# Altium PCB PCB2.PcbDoc (part 2 of 2)
Units mm, origin at the board's own origin, x right, y up, seen from the top; angles counter-clockwise.
Board outline 50.17 x 32.13 mm, 2 copper layers (Top Layer, Bottom Layer); 40 components, 154 nets, 422 pads, 221 vias.
Unrouted connection lines stored in the file: 21.
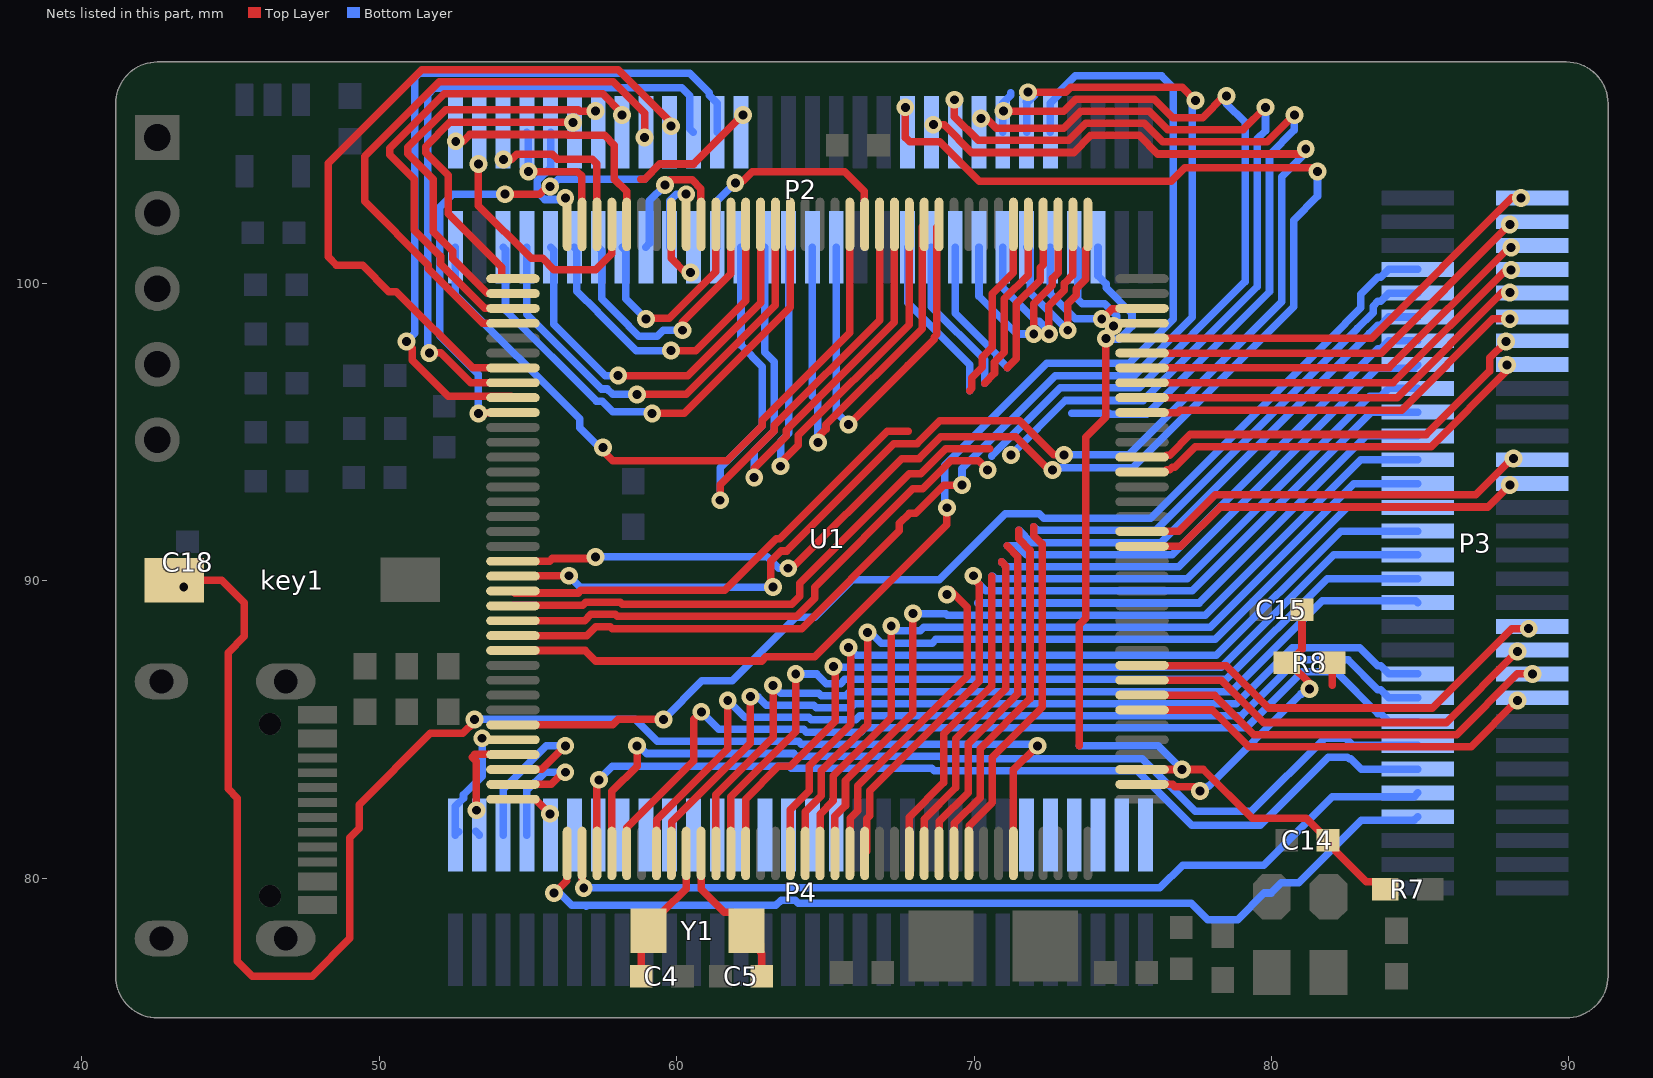
[diagram p2: the nets of this part, all layers, seen from the top]

## Via types
v1: diameter 0.6, hole 0.3, Top Layer to Bottom Layer, 221 vias

## Nets (pads, with @x,y where several pads share a name; then routed paths per layer and width w, separated by ;. In a path a pad name is that pad's centre, name@x,y a point inside that pad or via, vN(x,y) a via of type N, cw(c..) or ccw(c..) an arc to the next point about the centre after c; other vN are vias at no path point) (continued)
PB13: P2.55 U1.93 | length 17.4
  Top Layer w0.254: v1(59.182,95.631) 60.258,95.631 63.825,99.198 U1.93@63.825,101.981
  Bottom Layer w0.254: P2.55@54.168,101.219 54.25,101.137 54.25,99.102 57.31,96.042 57.504,96.042 57.859,95.687 59.126,95.687 v1(59.182,95.631)
PB14: P2.53 U1.94 | length 15.7
  Top Layer w0.254: v1(58.674,96.266) 60.319,96.266 63.325,99.272 U1.94@63.325,101.981
  Bottom Layer w0.254: P2.53@54.968,101.219 54.968,98.959 57.478,96.449 57.672,96.449 57.855,96.266 v1(58.674,96.266)
PB15: P2.51 U1.95 | length 13.9
  Top Layer w0.254: v1(58.039,96.901) 60.379,96.901 62.825,99.347 U1.95@62.825,101.981
  Bottom Layer w0.254: P2.51@55.768,101.219 55.872,101.115 55.872,98.629 57.601,96.901 v1(58.039,96.901)
PC4: P3.36 U1.54 | length 13.2
  Top Layer w0.254: U1.54@75.648,91.158 76.954,91.158 78.277,92.481 87.274,92.481 v1(88.011,93.218)
PC5: P3.38 U1.55 | length 13.5
  Top Layer w0.254: U1.55@75.648,91.658 75.657,91.667 76.888,91.667 78.109,92.888 86.861,92.888 88.081,94.107 v1(88.138,94.107)
PC6: P2.42 U1.115 | length 24.6
  Top Layer w0.254: U1.115@54.502,97.158 53.15,97.158 50.584,99.724 50.333,99.724 49.444,100.613 48.569,100.613 48.289,100.893 48.289,104.042 51.43,107.183 58.041,107.183 59.817,105.407 v1(59.817,105.283)
PC7: P2.40 U1.116 | length 22.2
  Top Layer w0.254: v1(51.689,97.663) 52.07,97.663 53.075,96.658 U1.116@54.502,96.658
  Bottom Layer w0.254: v1(51.689,97.663) 51.632,97.72 51.632,106.347 51.838,106.553 52.177,106.553 52.202,106.578 60.173,106.578 60.445,106.306 60.445,105.202 P2.40@60.568,105.079
PC8: P2.38 U1.117 | length 25.3
  Top Layer w0.254: v1(50.927,98.044) 50.927,98.001 51.054,97.874 51.11,97.818 51.11,97.423 52.322,96.21 54.45,96.21 U1.117@54.502,96.158
  Bottom Layer w0.254: v1(50.927,98.044) 51.206,98.323 51.206,106.912 51.355,107.061 60.451,107.061 61.097,106.415 61.097,106.32 61.368,106.049 P2.38@61.368,105.079
PC9: P2.36 U1.118 | length 20.2
  Top Layer w0.254: v1(53.34,95.631) 53.358,95.649 54.493,95.649 U1.118@54.502,95.658 ; v1(54.229,102.997) 55.405,102.997 55.659,103.251 v1(55.753,103.251) ; 58.801,103.505 58.928,103.505 59.436,104.013 60.579,104.013 v1(62.23,105.664)
  Bottom Layer w0.254: v1(53.34,95.631) 53.34,96.944 52.039,98.245 52.039,102.555 52.481,102.997 v1(54.229,102.997) ; v1(55.753,103.251) 55.767,103.251 56.021,103.505 58.928,103.505
PC10: P3.53 U1.139 | length 37.1
  Top Layer w0.254: U1.139@54.502,85.158 54.505,85.161 57.854,85.161 58.036,85.344 v1(59.563,85.344)
  Bottom Layer w0.254: v1(59.563,85.344) 60.854,86.635 61.87,86.635 64.008,88.773 64.643,88.773 65.913,90.043 68.834,90.043 71.044,92.253 72.188,92.253 72.34,92.1 75.937,92.1 82.479,98.643 82.479,98.651 83.007,99.179 83.007,99.629 83.577,100.199 83.672,100.199 83.943,100.47 P3.53@84.913,100.47
PC11: P4.60 U1.140 | length 4.9
  Top Layer w0.254: v1(53.467,84.709) 53.467,84.649 54.493,84.649 U1.140@54.502,84.658
  Bottom Layer w0.254: P4.60@52.675,81.564 P4.60@52.568,81.457 52.568,82.427 52.839,82.698 52.839,82.811 53.467,83.439 v1(53.467,84.709) v1@53.439,84.681
PC12: P4.58 U1.141 | length 3.4
  Top Layer w0.254: v1(53.27,82.288) 53.27,83.929 53.126,84.074 53.218,84.167 54.493,84.167 U1.141@54.502,84.158
  Bottom Layer w0.254: P4.58@53.245,81.58 P4.58@53.368,81.457
PC13: P3.19 U1.8 | length 30.2
  Top Layer w0.254: U1.8@59.825,80.835 59.834,80.844 59.834,81.898 62.484,84.548 v1(62.484,86.106)
  Bottom Layer w0.254: v1(62.484,86.106) 62.738,86.106 63.023,85.821 64.61,85.821 64.701,85.73 65.855,85.73 65.997,85.872 78.823,85.872 80.703,87.752 82.966,87.752 83.577,87.141 83.672,87.141 83.943,86.87 P3.19@84.913,86.87
PC14: C4.2 U1.9 Y1.2 | length 4.8
  Top Layer w0.254: C4.2@58.814,76.71 58.814,77.991 Y1.2@59.055,78.232 59.055,78.382 59.528,78.855 60.325,79.652 U1.9@60.325,80.835
PC15: C5.2 U1.10 Y1.1 | length 5
  Top Layer w0.254: U1.10@60.825,80.835 60.825,79.637 61.607,78.855 61.882,78.855 Y1.1@62.355,78.382 ; Y1.1@62.355,78.232 62.828,77.759 62.828,77.497 62.865,77.46 C5.2@62.865,76.708
PD0: P4.56 U1.142 | length 6.3
  Top Layer w0.254: U1.142@54.502,83.658 54.511,83.667 55.473,83.667 v1(56.261,84.455)
  Bottom Layer w0.254: P4.56@54.168,81.457 54.168,82.997 55.626,84.455 v1(56.261,84.455)
PD1: P4.54 U1.143 | length 5
  Top Layer w0.254: U1.143@54.502,83.158 55.783,83.158 56.191,83.566 v1(56.261,83.566)
  Bottom Layer w0.254: P4.54@54.968,81.457 54.968,82.954 55.58,83.566 v1(56.261,83.566)
PD2: P4.52 U1.144 | length 1.4
  Top Layer w0.254: U1.144@54.502,82.658 55.252,82.658 v1(55.741,82.169)
PD3: P4.50
PD4: P4.48
PD5: P4.46
PD6: P4.44
PD7: P4.42
PD8: P2.49 U1.96 | length 11.3
  Top Layer w0.254: v1(59.817,97.739) 60.642,97.739 62.325,99.422 U1.96@62.325,101.981
  Bottom Layer w0.254: P2.49@56.568,101.219 56.652,101.135 56.652,99.742 57.348,99.046 57.348,99.034 58.643,97.739 v1(59.817,97.739)
PD9: P2.47 U1.97 | length 9.3
  Top Layer w0.254: v1(60.198,98.425) 60.198,98.696 61.825,100.323 U1.97@61.825,101.981
  Bottom Layer w0.254: P2.47@57.368,101.219 57.491,101.096 57.491,99.478 58.391,98.578 58.391,98.566 58.73,98.227 59.351,98.227 59.549,98.425 v1(60.198,98.425)
PD10: P2.45 U1.98 | length 7.3
  Top Layer w0.254: v1(58.97,98.806) 58.996,98.831 59.758,98.831 61.325,100.398 U1.98@61.325,101.981
  Bottom Layer w0.254: P2.45@58.168,101.219 58.291,101.096 58.291,99.485 v1(58.97,98.806)
PD11: P2.43 U1.99 | length 5
  Top Layer w0.254: v1(59.614,103.302) 59.788,103.476 60.524,103.476 60.816,103.184 60.816,101.99 U1.99@60.825,101.981
  Bottom Layer w0.254: P2.43@58.968,101.219 59.091,101.342 59.091,102.779 v1(59.614,103.302)
PD12: P2.41 U1.100 | length 3.2
  Top Layer w0.254: U1.100@60.325,101.981 v1(60.325,102.997)
  Bottom Layer w0.254: P2.41@59.768,101.219 59.768,102.778 59.987,102.997 v1(60.325,102.997)
PD13: P2.39 U1.101 | length 2
  Top Layer w0.254: U1.101@59.825,101.981 59.825,100.839 60.301,100.363 v1(60.47,100.363)
PD14: P2.60 U1.104 | length 8.2
  Top Layer w0.254: v1@52.813,104.775 52.827,104.775 53.056,105.004 56.311,105.004 56.336,104.978 57.582,104.978 57.912,104.648 57.912,103.505 58.325,103.092 U1.104@58.325,101.981
  other v1: 52.578,104.775
PD15: P2.58 U1.105 | length 8
  Top Layer w0.254: v1(53.34,104.013) 53.34,102.616 55.118,100.838 55.499,100.838 55.88,100.457 57.277,100.457 57.816,100.996 57.816,101.972 U1.105@57.825,101.981
PE0: P4.12
PE1: P4.10
PE2: P3.7 U1.1 | length 32.4
  Top Layer w0.254: v1@56.007,79.616 56.316,79.925 56.316,80.826 U1.1@56.325,80.835
  Bottom Layer w0.254: v1(55.88,79.502) 56.077,79.502 56.482,79.096 56.934,79.096 56.968,79.062 57.002,79.096 63.342,79.096 63.514,79.269 63.994,79.269 64.094,79.169 77.295,79.169 77.851,78.613 78.867,78.613 79.761,79.507 79.997,79.507 80.334,79.844 80.917,79.844 83.02,81.947 84.79,81.947 P3.7@84.913,82.07
PE3: P3.9 U1.2 | length 30.4
  Top Layer w0.254: U1.2@56.825,80.835 56.834,80.826 v1@56.834,79.819
  Bottom Layer w0.254: v1(56.882,79.676) 76.247,79.676 77.018,80.447 79.742,80.447 82.044,82.748 84.791,82.748 P3.9@84.913,82.87
PE4: P3.11 U1.3 | length 32.2
  Top Layer w0.254: U1.3@57.334,80.826 U1.3@57.325,80.835 57.325,83.219 57.393,83.287 v1(57.393,83.312)
  Bottom Layer w0.254: v1(57.393,83.312) 57.845,83.763 63.794,83.763 63.86,83.698 66.696,83.698 66.699,83.7 68.573,83.7 68.656,83.617 75.486,83.617 77.315,81.788 79.629,81.788 81.915,84.074 82.552,84.074 82.608,84.018 82.663,84.018 83.011,83.67 P3.11@84.913,83.67
PE5: P3.13 U1.4 | length 32.2
  Top Layer w0.254: U1.4@57.825,80.835 57.825,82.924 58.674,83.773 v1(58.674,84.455)
  Bottom Layer w0.254: v1(58.674,84.455) 58.742,84.455 59.001,84.196 63.937,84.196 64.028,84.104 66.528,84.104 66.53,84.107 68.884,84.107 68.968,84.023 75.655,84.023 77.43,82.248 79.327,82.248 81.785,84.706 82.501,84.706 82.737,84.47 P3.13@84.913,84.47
PE6: P3.15 U1.5 | length 31.7
  Top Layer w0.254: U1.5@58.325,80.835 58.334,80.844 58.334,81.701 60.579,83.946 60.579,85.344 v1(60.833,85.598)
  Bottom Layer w0.254: v1(60.833,85.598) 61.423,85.008 64.273,85.008 64.365,84.917 66.191,84.917 66.333,85.059 79.16,85.059 81.04,86.939 82.178,86.939 83.577,85.541 83.672,85.541 83.943,85.27 P3.15@84.913,85.27
PE7: P3.60 U1.68 | length 14.7
  Top Layer w0.254: U1.68@75.648,98.158 83.369,98.158 88.081,102.87 v1(88.392,102.87)
PE8: P2.7 U1.69 | length 3.7
  Bottom Layer w0.254: P2.7@73.368,101.219 73.491,101.096 73.491,99.463 73.64,99.314 74.398,99.314 74.803,98.909 74.803,98.679 v1(74.688,98.564)
PE9: P2.9 U1.70 | length 5.1
  Top Layer w0.254: v1(74.295,98.806) 74.309,98.806 74.652,99.149 75.639,99.149 U1.70@75.648,99.158
  Bottom Layer w0.254: P2.9@72.568,101.219 72.568,99.644 73.406,98.806 v1(74.295,98.806)
PE10: P2.11 U1.73 | length 7.2
  Top Layer w0.254: v1(73.152,98.425) 73.152,99.314 73.444,99.606 73.444,99.826 73.754,100.137 73.754,101.148 73.825,101.219 U1.73@73.825,101.981
  Bottom Layer w0.254: P2.11@71.768,101.219 71.891,101.096 71.891,99.686 v1(73.152,98.425)
PE11: P2.13 U1.74 | length 7.6
  Top Layer w0.254: v1(72.517,98.298) 72.517,99.254 73.038,99.774 73.038,99.995 73.325,100.282 U1.74@73.325,101.981
  Bottom Layer w0.254: P2.13@70.968,101.219 70.968,99.847 72.085,98.73 72.188,98.73 72.517,98.401 v1(72.517,98.298)
PE12: P2.15 U1.75 | length 8
  Top Layer w0.254: v1(72.009,98.298) 72.009,99.32 72.631,99.943 72.631,100.163 72.825,100.357 U1.75@72.825,101.981
  Bottom Layer w0.254: P2.15@70.168,101.219 70.168,99.569 71.439,98.298 v1(72.009,98.298)
PE13: P2.17 U1.76 | length 10.1
  Top Layer w0.254: 71.12,97.169 71.425,97.474 71.425,99.311 72.225,100.111 72.225,100.525 72.325,100.625 U1.76@72.325,101.981
  Bottom Layer w0.254: P2.17@69.368,101.219 69.368,98.996 70.764,97.599 70.764,97.538 71.12,97.183 71.12,97.169
PE14: P2.19 U1.77 | length 11.3
  Top Layer w0.254: 70.358,96.647 70.688,96.977 70.688,97.348 71.018,97.678 71.018,99.479 71.819,100.279 71.819,100.693 71.825,100.7 U1.77@71.825,101.981
  Bottom Layer w0.254: P2.19@68.568,101.219 68.568,99.221 70.358,97.431 70.358,96.647
PE15: P2.21 U1.78 | length 11.9
  Top Layer w0.254: 69.85,96.393 69.926,96.469 69.926,96.826 70.282,97.181 70.282,97.516 70.612,97.846 70.612,99.648 71.325,100.361 U1.78@71.325,101.981
  Bottom Layer w0.254: P2.21@67.768,101.219 67.768,99.346 69.85,97.264 69.85,96.393
PF0: P3.31 U1.16 | length 28.8
  Top Layer w0.254: U1.16@63.825,80.835 63.825,82.31 64.46,82.945 64.46,83.784 65.857,85.181 65.857,87.686 v1(65.786,87.757)
  Bottom Layer w0.254: v1(65.786,87.757) 66.045,87.498 78.15,87.498 82.322,91.67 P3.31@84.913,91.67
PF1: P3.33 U1.17 | length 28.8
  Top Layer w0.254: U1.17@64.325,80.835 64.325,82.235 64.867,82.777 64.867,83.615 66.421,85.17 v1(66.421,88.265)
  Bottom Layer w0.254: v1(66.421,88.265) 66.514,88.265 66.876,87.904 68.59,87.904 68.723,88.037 ; 68.766,88.036 78.114,88.036 82.547,92.47 P3.33@84.913,92.47
PF2: P3.35 U1.18 | length 28.5
  Top Layer w0.254: U1.18@64.825,80.835 64.825,82.16 65.273,82.608 65.273,83.447 67.219,85.393 v1(67.219,88.483)
  Bottom Layer w0.254: v1(67.219,88.483) 67.381,88.321 68.185,88.321 68.307,88.443 68.891,88.443 77.946,88.443 82.773,93.27 P3.35@84.913,93.27
PF3: P3.37 U1.19 | length 28.3
  Top Layer w0.254: U1.19@65.325,80.835 65.325,82.085 65.68,82.44 65.68,83.279 67.945,85.544 v1(67.945,88.9)
  Bottom Layer w0.254: v1(67.945,88.9) 69.055,88.9 69.105,88.849 77.777,88.849 82.998,94.07 P3.37@84.913,94.07
PF4: P3.39 U1.20 | length 27.9
  Top Layer w0.254: U1.20@65.825,80.835 65.834,80.844 65.834,82.019 66.086,82.272 66.086,83.11 69.771,86.795 69.771,89.106 v1@69.179,89.698
  Bottom Layer w0.254: 70.129,89.256 77.572,89.256 83.186,94.87 P3.39@84.913,94.87
  other v1: 69.088,89.535
PF5: P3.41 U1.21 | length 28.7
  Top Layer w0.254: U1.21@66.325,80.835 66.392,80.902 66.392,82.003 66.492,82.103 66.492,82.942 70.177,86.627 70.177,89.883 69.977,90.083 v1(69.977,90.17)
  Bottom Layer w0.254: v1(69.977,90.17) 69.977,90.083 70.398,89.662 77.343,89.662 83.351,95.67 P3.41@84.913,95.67
PF6: P3.43 U1.24 | length 27.5
  Top Layer w0.254: U1.24@67.825,80.835 67.825,82.06 68.986,83.221 68.986,84.861 70.59,86.465 70.59,90.148
  Bottom Layer w0.254: 70.59,90.148 70.634,90.148 70.714,90.068 77.175,90.068 83.306,96.199 83.672,96.199 83.943,96.47 P3.43@84.913,96.47
PF7: P3.45 U1.25 | length 27.9
  Top Layer w0.254: U1.25@68.325,80.835 68.325,81.985 69.393,83.053 69.393,84.693 71.069,86.369 71.069,90.494 70.93,90.634
  Bottom Layer w0.254: 70.93,90.634 71.088,90.475 76.886,90.475 83.558,97.147 84.79,97.147 P3.45@84.913,97.27
PF8: P3.47 U1.26 | length 28.5
  Top Layer w0.254: U1.26@68.825,80.835 68.834,80.844 68.834,81.919 69.799,82.885 69.799,84.525 71.476,86.201 71.476,90.817 71.12,91.172 71.12,91.186
  Bottom Layer w0.254: 71.12,91.186 71.459,91.186 71.763,90.881 76.659,90.881 83.577,97.799 83.672,97.799 83.943,98.07 P3.47@84.913,98.07
PF9: P3.49 U1.27 | length 28.8
  Top Layer w0.254: U1.27@69.325,80.835 69.334,80.844 69.334,81.844 70.206,82.716 70.206,84.356 71.882,86.033 71.882,91.035 71.501,91.416 71.501,91.694
  Bottom Layer w0.254: 71.501,91.694 71.525,91.694 71.932,91.288 76.274,91.288 83.292,98.306 83.292,98.314 83.577,98.599 83.672,98.599 83.943,98.87 P3.49@84.913,98.87
PF10: P3.51 U1.28 | length 28.5
  Top Layer w0.254: U1.28@69.825,80.835 69.834,80.844 69.834,81.77 70.612,82.548 70.612,84.074 72.288,85.75 72.288,91.238 72.009,91.517 72.009,91.821
  Bottom Layer w0.254: 72.009,91.821 72.136,91.694 76.105,91.694 82.886,98.474 82.886,98.483 83.414,99.01 83.414,99.236 83.577,99.399 83.672,99.399 83.943,99.67 P3.51@84.913,99.67
PF11: P3.46 U1.59 | length 13.9
  Top Layer w0.254: U1.59@75.648,93.658 76.41,93.658 76.481,93.729 76.576,93.729 76.669,93.822 76.744,93.822 77.435,94.513 85.367,94.513 87.913,97.06 v1(87.913,97.253)
PF12: P3.48 U1.60 | length 14.1
  Top Layer w0.254: U1.60@75.648,94.158 76.41,94.158 76.481,94.229 76.576,94.229 77.267,94.92 85.198,94.92 87.333,97.055 87.333,97.493 v1(87.884,98.044)
PF13: P3.50 U1.63 | length 13.7
  Top Layer w0.254: U1.63@75.648,95.658 76.856,95.658 76.93,95.733 84.372,95.733 87.446,98.806 v1(88.011,98.806)
PF14: P3.52 U1.64 | length 13.8
  Top Layer w0.254: U1.64@75.648,96.158 84.223,96.158 87.76,99.695 v1(88.011,99.695)
PF15: P3.54 U1.65 | length 14
  Top Layer w0.254: U1.65@75.648,96.658 84.085,96.658 87.874,100.447 v1(88.059,100.447)
PG0: P3.56 U1.66 | length 14.1
  Top Layer w0.254: U1.66@75.648,97.158 83.95,97.158 88.001,101.209 v1(88.059,101.209)
PG1: P3.58 U1.67 | length 14.2
  Top Layer w0.254: U1.67@75.648,97.658 83.688,97.658 v1(88.011,101.981)
PG2: P2.56 U1.106 | length 5.4
  Top Layer w0.254: v1(54.185,104.165) 54.461,104.165 54.634,104.338 55.826,104.338 55.999,104.165 57.167,104.165 57.316,104.017 57.316,101.99 U1.106@57.325,101.981
PG3: P2.54 U1.107 | length 4.8
  Top Layer w0.254: v1(55.024,103.759) 56.667,103.759 56.816,103.61 56.816,101.99 U1.107@56.825,101.981
  Bottom Layer w0.254: P2.54@54.968,105.079 55.014,105.033 55.014,103.769 v1(55.024,103.759)
PG4: P2.52 U1.108 | length 3.3
  Bottom Layer w0.254: P2.52@55.768,105.079 55.768,103.893 55.321,103.446 55.321,103.072 55.574,102.819 56.196,102.819 56.247,102.87 v1(56.261,102.87)
PG5: P2.50 U1.109 | length 11.1
  Top Layer w0.254: U1.109@54.502,100.158 54.141,100.158 54.12,100.179 54.12,100.54 52.324,102.336 52.324,103.632 51.568,104.388 51.568,104.598 52.38,105.41 v1(56.515,105.41)
PG6: P2.48 U1.110 | length 13.7
  Top Layer w0.254: U1.110@54.502,99.658 54.493,99.667 53.632,99.667 52.472,100.827 52.472,101.075 51.816,101.731 51.816,103.505 50.963,104.358 50.963,104.568 52.237,105.842 56.694,105.842 56.744,105.792 v1(57.277,105.791) v1(57.277,105.791)
PG7: P2.46 U1.111 | length 16.5
  Top Layer w0.254: U1.111@54.502,99.158 54.493,99.167 53.554,99.167 52.065,100.656 52.065,100.907 51.181,101.791 51.181,103.505 50.359,104.327 50.359,104.538 52.191,106.37 57.517,106.37 58.166,105.721 v1(58.166,105.664)
PG8: P2.44 U1.112 | length 20
  Top Layer w0.254: U1.112@54.502,98.658 53.488,98.658 51.659,100.487 51.659,100.614 49.515,102.758 49.515,104.269 52.023,106.777 57.873,106.777 58.928,105.721 v1(58.928,104.902)
PG9: P4.40
PG10: P4.38
PG11: P4.36
PG12: P4.34
PG13: P4.32
PG14: P4.30
PG15: P4.28
PH2: P3.18 U1.43 | length 13.8
  Top Layer w0.254: U1.43@75.648,85.658 78.01,85.658 79.243,84.425 86.711,84.425 v1(88.265,85.979)
PH3: P3.20 U1.44 | length 14.5
  Top Layer w0.254: U1.44@75.648,86.158 78.084,86.158 79.411,84.831 86.228,84.831 88.267,86.87 v1(88.773,86.87)
PH4: P3.22 U1.45 | length 14.2
  Top Layer w0.254: U1.45@75.648,86.658 78.315,86.658 79.735,85.238 85.873,85.238 v1(88.265,87.63)
PH5: P3.24 U1.46 | length 14.7
  Top Layer w0.254: U1.46@75.648,87.158 75.657,87.149 78.478,87.149 79.902,85.725 85.411,85.725 88.078,88.392 v1(88.646,88.392)
PH6: P2.27 U1.83 | length 14.3
  Top Layer w0.254: v1(65.786,95.25) 67.782,97.246 67.818,97.282 68.656,98.12 68.656,98.19 68.754,98.288 68.754,101.892 68.834,101.972 U1.83@68.825,101.981
  Bottom Layer w0.254: P2.27@65.368,101.219 65.368,95.668 v1(65.786,95.25) v1@65.881,95.155
PH7: P2.29 U1.84 | length 15.4
  Top Layer w0.254: v1(64.753,94.647) v1@64.848,94.742 ; v1@64.77,94.836 65.024,95.09 65.024,95.241 68.254,98.471 68.254,101.91 U1.84@68.325,101.981
  Bottom Layer w0.254: P2.29@64.568,101.219 64.568,96.214 64.753,96.029 v1(64.753,94.647)
PH8: P2.31 U1.85 | length 17.4
  Top Layer w0.254: v1(63.5,93.853) 63.5,93.969 64.096,94.564 64.096,94.887 67.825,98.616 U1.85@67.825,101.981
  Bottom Layer w0.254: v1(63.5,93.853) 63.5,94.69 63.768,94.958 P2.31@63.768,101.219
PH9: P2.33 U1.86 | length 18.6
  Top Layer w0.254: v1(62.611,93.472) 62.611,93.783 63.689,94.862 63.689,95.055 67.325,98.691 U1.86@67.325,101.981
  Bottom Layer w0.254: v1(62.611,93.472) 62.611,94.375 63.283,95.047 63.283,97.372 62.968,97.687 P2.33@62.968,101.219
PH10: P2.35 U1.87 | length 20.9
  Top Layer w0.254: v1(61.468,92.71) 61.468,93.232 63.283,95.047 63.283,95.224 66.825,98.766 U1.87@66.825,101.981
  Bottom Layer w0.254: v1(61.468,92.71) 61.468,93.807 62.876,95.215 62.876,97.204 62.168,97.912 P2.35@62.168,101.219
PH11: P2.37 U1.88 | length 8.3
  Top Layer w0.254: v1(61.976,103.378) 62.042,103.444 62.237,103.444 62.552,103.759 65.659,103.759 66.316,103.102 66.316,101.99 U1.88@66.325,101.981
  Bottom Layer w0.254: P2.37@61.368,101.219 61.368,102.77 v1(61.976,103.378)
PH12: P2.59 U1.89 | length 22.9
  Top Layer w0.254: v1(57.531,94.488) 57.531,94.361 57.856,94.036 61.697,94.036 62.876,95.215 62.876,95.392 65.825,98.341 U1.89@65.825,101.981
  Bottom Layer w0.254: P2.59@52.568,101.219 52.568,99.621 56.74,95.449 56.74,95.152 57.404,94.488 v1(57.531,94.488)
PH13: P2.22 U1.128 | length 51.6
  Top Layer w0.254: U1.128@54.502,90.658 55.733,90.658 55.827,90.752 57.224,90.752 v1(57.277,90.805) ; v1(63.754,90.424) 63.881,90.424 67.564,94.107 68.15,94.107 68.887,94.844 71.399,94.844 72.507,93.736 72.634,93.736 v1(72.644,93.726) ; v1(67.691,105.918) 67.691,104.904 67.84,104.755 68.854,104.755 70.175,103.434 76.637,103.434 77.089,103.886 81.38,103.886 81.507,103.759 v1(81.547,103.759)
  Bottom Layer w0.254: v1(57.277,90.805) 63.049,90.805 63.43,90.424 v1(63.754,90.424) ; v1(72.644,93.726) 72.72,93.802 75.34,93.802 80.747,99.209 80.747,102.128 81.547,102.928 v1(81.547,103.759)
PH14: P2.20 U1.129 | length 50.5
  Top Layer w0.254: U1.129@54.502,90.158 54.508,90.164 56.382,90.164 v1(56.388,90.17) ; v1(63.246,89.789) 63.175,89.86 63.175,90.664 63.514,91.003 63.698,91.003 67.31,94.615 68.083,94.615 68.845,95.377 71.532,95.377 72.675,94.234 v1(73.025,94.234) ; v1(68.631,105.334) 68.641,105.325 69.004,105.325 69.93,104.399 73.353,104.399 73.928,104.973 75.551,104.973 76.176,104.348 80.98,104.348 v1(81.153,104.521)
  Bottom Layer w0.254: v1(56.388,90.17) 56.769,89.789 v1(63.246,89.789) ; v1(73.025,94.234) 75.197,94.234 80.34,99.377 80.34,103.581 81.153,104.394 v1(81.153,104.521)
PH15: P2.18 U1.130 | length 43.4
  Top Layer w0.254: U1.130@54.502,89.658 54.569,89.591 56.694,89.591 56.786,89.683 61.618,89.683 63.346,91.41 63.47,91.41 67.082,95.022 67.79,95.022 ; v1(69.342,106.172) 69.342,105.607 70.143,104.805 73.185,104.805 73.76,105.38 75.719,105.38 76.345,104.754 79.862,104.754 v1(80.772,105.664)
  Bottom Layer w0.254: 73.279,95.631 74.54,95.631 74.566,95.606 75.813,95.606 79.934,99.726 79.934,104.318 80.772,105.156 v1(80.772,105.664)
PI0: P2.16 U1.131 | length 45.8
  Top Layer w0.254: U1.131@54.502,89.158 54.52,89.176 56.854,89.176 56.954,89.276 58.108,89.276 58.174,89.21 63.867,89.21 64.135,89.478 64.135,89.916 67.818,93.599 68.217,93.599 69.055,94.437 70.536,94.437 ; v1(70.231,105.537) 70.428,105.537 70.753,105.212 73.017,105.212 73.591,105.786 75.888,105.786 76.513,105.161 79.042,105.161 v1(79.799,105.918)
  Bottom Layer w0.254: v1(71.247,94.234) 73.076,96.063 75.695,96.063 79.527,99.895 79.527,104.861 79.799,105.133 v1(79.799,105.918)
PI1: P2.14 U1.132 | length 45.8
  Top Layer w0.254: U1.132@54.502,88.658 56.911,88.658 57.123,88.87 57.939,88.87 58.006,88.803 64.035,88.803 64.643,89.411 64.643,89.789 67.945,93.091 68.284,93.091 69.223,94.031 70.156,94.031 v1(70.461,93.726) v1@70.6,93.726 ; v1(70.993,105.791) 73.021,105.791 73.423,106.193 76.056,106.193 76.681,105.567 77.685,105.567 78.416,106.299 v1(78.486,106.299)
  Bottom Layer w0.254: 70.6,94.197 72.897,96.495 75.553,96.495 79.121,100.063 79.121,105.41 78.486,106.045 v1(78.486,106.299) ; P2.14@70.968,105.079 70.968,106.049 71.239,106.32 71.239,106.415
PI2: P2.12 U1.133 | length 42.9
  Top Layer w0.254: U1.133@54.502,88.158 56.986,88.158 57.291,88.463 57.771,88.463 57.838,88.397 64.204,88.397 67.493,91.686 67.493,91.934 67.832,92.273 68.041,92.273 68.985,93.218 v1(69.596,93.218) ; v1(71.818,106.426) 73.082,106.426 73.255,106.599 76.992,106.599 v1(77.445,106.147)
  Bottom Layer w0.254: v1(69.596,93.218) 69.596,93.768 72.729,96.901 75.384,96.901 77.343,98.86 77.343,106.031 77.445,106.133 v1(77.445,106.147) ; P2.12@71.768,105.079 71.768,106.049 P2.12@71.791,106.072 ; v1(71.818,106.426) 71.818,106.172 71.755,106.109 P2.12@71.791,106.072 ; v1@72.039,106.415 72.039,106.32 P2.12@71.791,106.072
PI3: P2.10 U1.134 | length 41.9
  Top Layer w0.254: U1.134@54.502,87.658 56.938,87.658 57.291,87.305 62.863,87.305 63.006,87.447 64.645,87.447 69.088,91.891 v1(69.088,92.456)
  Bottom Layer w0.254: v1(69.088,92.456) 69.017,92.527 69.017,93.88 72.444,97.307 75.216,97.307 76.704,98.795 76.704,106.583 76.302,106.985 73.409,106.985 72.839,106.415 72.839,106.32 72.568,106.049 P2.10@72.568,105.079
PI4: P4.8
PI5: P4.6
PI6: P4.4
PI7: P4.2
PI8: P3.17 U1.7 | length 31
  Top Layer w0.254: U1.7@59.325,80.835 59.334,80.844 59.334,81.973 61.722,84.361 v1(61.722,85.979)
  Bottom Layer w0.254: v1(61.722,85.979) 62.286,85.415 64.442,85.415 64.533,85.323 66.023,85.323 66.165,85.466 78.991,85.466 80.872,87.346 82.572,87.346 83.577,86.341 83.672,86.341 83.943,86.07 P3.17@84.913,86.07
PI9: P3.25 U1.11 | length 29.6
  Top Layer w0.254: U1.11@61.325,80.835 61.325,82.815 63.246,84.736 v1(63.246,86.487)
  Bottom Layer w0.254: v1(63.246,86.487) 63.505,86.228 64.778,86.228 64.87,86.136 65.686,86.136 65.828,86.278 78.655,86.278 81.714,89.337 84.846,89.337 P3.25@84.913,89.27
PI10: P3.27 U1.12 | length 29.4
  Top Layer w0.254: U1.12@61.825,80.835 61.825,82.74 64.008,84.923 v1(64.008,86.868)
  Bottom Layer w0.254: v1(64.008,86.868) 64.713,86.868 65.038,86.543 65.518,86.543 65.66,86.685 78.486,86.685 81.872,90.07 P3.27@84.913,90.07
PI11: P3.29 U1.13 | length 29.1
  Top Layer w0.254: U1.13@62.325,80.835 62.325,82.665 63.424,83.764 63.823,83.764 65.332,85.273 v1@65.332,87.246
  Bottom Layer w0.254: v1(65.278,87.122) 65.309,87.091 78.318,87.091 82.097,90.87 P3.29@84.913,90.87
RST: C18.2 key1.2 U1.31 | length 52.6
  Top Layer w0.254: key1.2@43.121,90.023 44.705,90.023 45.466,89.262 45.466,88.13 44.923,87.588 44.923,83.007 45.237,82.693 45.237,77.216 45.745,76.708 47.752,76.708 49.022,77.978 49.022,81.37 49.332,81.68 49.332,82.479 51.727,84.874 52.821,84.874 53.213,85.266 v1(53.213,85.344) ; U1.31@71.325,80.835 71.325,83.644 v1(72.136,84.455)
  Bottom Layer w0.254: v1(53.213,85.344) 58.604,85.344 59.346,84.602 64.105,84.602 64.196,84.511 66.36,84.511 66.362,84.513 72.078,84.513 v1(72.136,84.455)
  other v1: 43.434,89.789
VDDA: C14.2 P2.5 R7.2 R8.1 U1.39 | length 32.4
  Top Layer w0.254: 73.533,84.455 73.533,88.519 73.762,88.748 73.762,94.819 74.435,95.492 v1(74.435,98.146) ; U1.39@75.648,83.658 77.711,83.658 79.357,82.012 81.169,82.012 C14.2@81.902,81.278 82.156,81.024 82.156,80.912 83.185,79.883 R7.2@83.566,79.883 ; 82.042,86.487 R8.1@82.042,87.249
  Bottom Layer w0.254: 73.533,84.455 76.196,84.455 v1(76.99,83.661) ; P2.5@74.168,101.219 74.168,100.249 74.439,99.978 74.439,99.848 75.311,98.975 75.311,98.552 74.879,98.12 74.521,98.12 74.506,98.136 74.444,98.136 v1(74.435,98.146)
VREF+: C15.1 R8.2 U1.38 | length 10.3
  Top Layer w0.254: U1.38@75.648,83.158 76.674,83.158 76.75,83.081 77.447,83.081 v1(77.597,82.931) ; R8.2@80.518,87.249 80.581,87.249 81.026,87.694 C15.1@81.026,89.027 ; R8.2@80.65,87.18 81.28,86.55 v1(81.28,86.36)
  Bottom Layer w0.254: v1(77.597,82.931) 77.691,82.931 77.855,83.095 77.888,83.095 80.989,86.196 81.022,86.196 81.186,86.36 v1(81.28,86.36)
pads on no net: P2.24 P2.26 P2.28 P2.30 P2.32 P2.34 P3.10 P3.21 P3.23 P4.39 P4.41 P4.43 P4.45 P4.47 U1.6 U2.4 USBC1. USBC1.0 USBC1.A5 USBC1.A8 USBC1.B5 USBC1.B8

## Other copper
Bottom Layer:
  rectangle net GND: 61.341,76.627 69.368,78.613
  rectangle net 5V: 70.104,76.708 75.692,78.613

## Silkscreen, mask and mechanical layers (free items; w line width, h text height)
Top Overlay:
  text "Pa_H7_IITx v1" at 87.757,105.537 h1.52 r270
Mechanical 1:
  lines w0.254: 42.926,75.438 88.9,75.438 ; 42.926,107.315 89.916,107.315 ; 43.561,107.315 42.545,107.315 ccw(c42.545,106.045) 41.275,106.045 41.275,76.708 ccw(c42.545,76.708) 42.545,75.438 43.942,75.438 ; 87.503,75.438 89.916,75.438 ccw(c89.916,76.708) 91.186,76.708 91.186,106.045 ccw(c89.916,106.045) 89.916,107.315 ; 88.392,107.315 89.916,107.315